# Altium PCB Customized Battery Management System - Load Sharing System.PcbDoc
Units mm, origin at the board's own origin, x right, y up, seen from the top; angles counter-clockwise.
Board outline 40 x 30 mm, 2 copper layers (Top Layer, Bottom Layer); 32 components, 21 nets, 111 pads, 0 vias.
Unrouted connection lines stored in the file: 76.
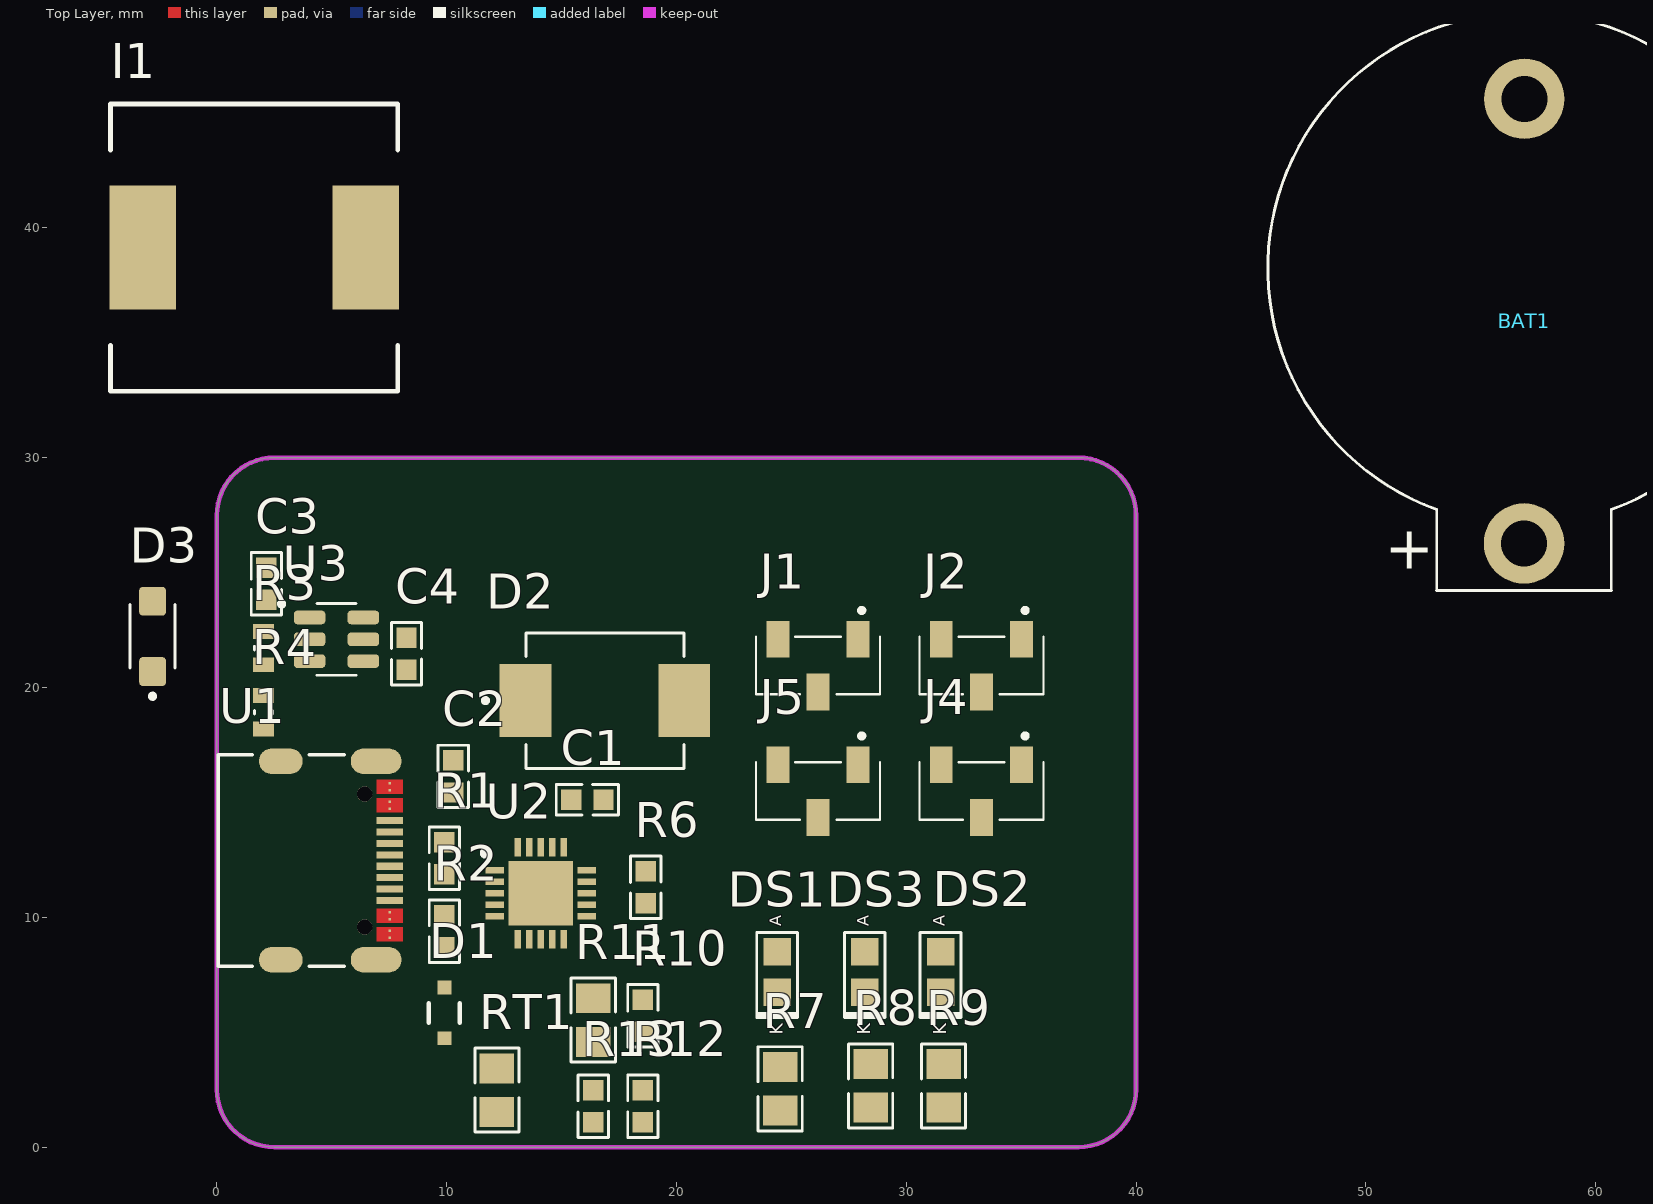
[diagram p0: Top Layer view]
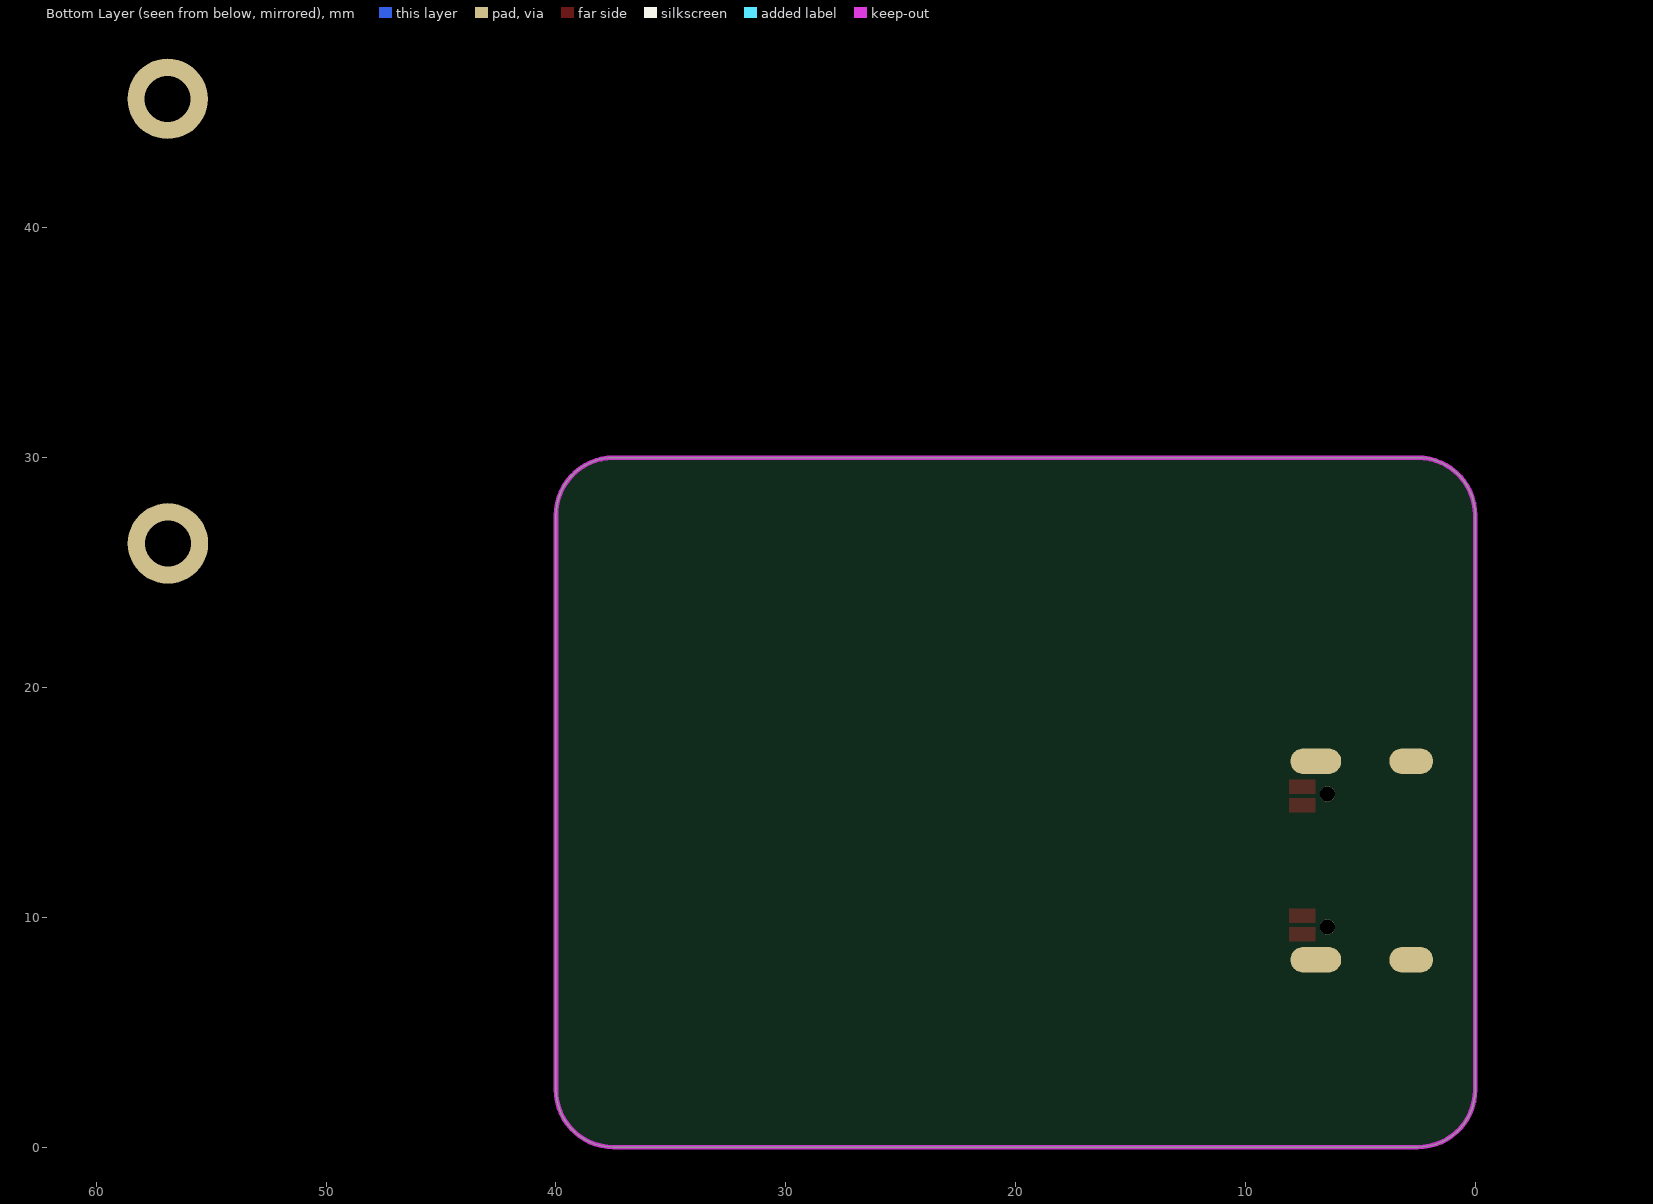
[diagram p1: Bottom Layer view, seen from below]

## Layer stack, top to bottom
Top Solder: solder mask 0.0102, Solder Resist, Dk 3.5
Top Layer: signal copper 0.0356
Dielectric 1: dielectric 0.32, FR-4, Dk 4.8
Bottom Layer: signal copper 0.0356
Bottom Solder: solder mask 0.0102, Solder Resist, Dk 3.5

## Board outline
0,2.5 0,27.5 cw(c2.5,27.5) 2.5,30 37.5,30 cw(c37.5,27.5) 40,27.5 40,2.5 cw(c37.5,2.5) 37.5,0 2.5,0 cw(c2.5,2.5)

## Design rules (kind name [scope] priority, off if disabled: settings)
Clearance [All] p1: gap=0.254 ignorepadtopadclearanceinfootprint=FALSE
PolygonConnect [All] p1: connectstyle=Relief reliefconductorwidth=0.254 reliefentries=4 polygonreliefangle="90 Angle" airgapwidth=0.254
RoutingVias [All] p1: holewidth=0.711 width=1.27 viastyle="Through Hole" minholewidth=0.711 minwidth=1.27 maxholewidth=0.711 maxwidth=1.27
SolderMaskExpansion [All] p1: expansion=0.102 istentingtop=FALSE
SupplyNets "Schematic Supply Nets_6" [InNet('VBus +5V')] p1: voltage=0.000
SupplyNets "Schematic Supply Nets_5" [InNet('+12V_Boost')] p2: voltage=0.000
SupplyNets "Schematic Supply Nets_3" [InNet('GND')] p3: voltage=0.000
SupplyNets "Schematic Supply Nets_2" [InNet('5V_USB_BUS')] p4: voltage=0.000
SupplyNets "Schematic Supply Nets_1" [InNet('5V_Vbus_BMS')] p5: voltage=0.000
SupplyNets "Schematic Supply Nets" [InNet('+5V_Battery_Supply')] p6: voltage=0.000
Width [All] p1: maxlimit=0.254 minlimit=0.254 preferedwidth=0.254
30 further rules are at their usual default settings.

## Classes and differential pairs
component class "USB-C - UART Serial Bridge": D1 R1 R2 U1
component class "Boost-Converter for OLED Interfce": C3 C4 D3 I1 R3 R4 R14 R15 U3
component class "BMS-Load Sharing Section": BAT1 C1 C2 D2 DS1 DS2 DS3 J1 J2 J4 J5 R6 R7 R8 R9 R10 R11 R12 R13 RT1 U2

## Components (designator, comment, footprint, x,y, rotation, side; value= is the part's Value field where it differs from the comment)
BAT1 "COM-2292" BAT_761_TH 56.896,37.465 r0 top
C1 "10uF" RES_0603 16.129,15.113 r180 top
C2 "4.7uF" RES_0603 10.287,16.129 r270 top
C3 "22uF" RES_0603 2.159,24.511 r270 top
C4 "22uF" RES_0603 8.255,21.463 r90 top
D1 "PESD3V3L1BA," Nexperia_SOD323_0 9.906,5.842 r90 top
D2 "=value" "SMC (DO-214AB)" 16.891,19.431 r0 top
D3 "SS24FL" "Diode SS24FL" -2.794,22.225 r90 top
DS1 "RED" LED_0805 24.384,7.62 r90 top
DS2 "GREEN LED" LED_0805 31.496,7.62 r90 top
DS3 "BLUE LED" LED_0805 28.194,7.62 r90 top
I1 "SSR1260-330M" IND_33uH_60m_Ohm_3A 1.651,39.116 r180 top
J1 "CJS-1200TA2" CJS1200TA2 26.162,20.955 r180 top
J2 "CJS-1200TA2" CJS1200TA2 33.274,20.955 r180 top
J4 "CJS-1200TA2" CJS1200TA2 33.274,15.494 r180 top
J5 "CJS-1200TA2" CJS1200TA2 26.162,15.494 r180 top
R1 "5.1K Ω" RES_0603 9.906,12.573 r90 top
R2 "5.1K Ω" RES_0603 9.906,9.398 r90 top
R3 "ERJU03J106V" "RES 0603 Panasonic" 2.032,21.717 r90 top
R4 "ERJU03J106V" "RES 0603 Panasonic" 2.032,18.923 r90 top
R6 "10K" RES_0603 18.669,11.303 r270 top
R7 "470R" RES_0805 24.511,2.54 r270 top
R8 "470R" RES_0805 28.448,2.667 r270 top
R9 "470R" RES_0805 31.623,2.667 r270 top
R10 "330K" RES_0603 18.542,5.715 r270 top
R11 "18K" RES_0805 16.383,5.527 r270 top
R12 "110K" RES_0603 18.542,1.778 r90 top
R13 "10K" RES_0603 16.383,1.778 r90 top
RT1 "10K" RES_0805 12.192,2.479 r270 top
U1 "C393939" "USB-C 16Pin" 3.856,12.473 r270 top
U2 "MCP73871" QFN50P400X400X100-21N-D 14.097,11.049 r0 top
U3 "MT3608" SOT95P280X145-6N 5.207,22.098 r0 top

## Footprints (in the part's own frame and the unit in brackets; to place one, negate y for a bottom-side part, rotate by r counter-clockwise, add the part's x,y. Pads: shape width x height; smd on the part's side, far side on the other; paste and mask are expansions set on the pad)
BAT_761_TH [mm] "Battery holder"
  round 3.5 hole 2: 1(-0.013,-11.195) 2(0,8.15)
  silkscreen extent -11.16,-13.24 11.13,11.91
CJS1200TA2 [mm]
  rect 1x1.6 smd: 1(-1.75,-1.15) 2(0,1.15) 3(1.75,-1.15)
  silkscreen extent -2.7,-2.5 2.7,1.25
"Diode SS24FL" [mm]
  rrect25% 1.25x1.16 smd: A(1.53,0) C(-1.53,0)
  silkscreen extent -2.7,-0.97 1.38,0.97, body extent -1.8,-0.86 1.8,0.86, height 1.08
IND_33uH_60m_Ohm_3A [mm]
  rect 2.9x5.4 smd paste+0 mask+0: 1(-4.825,-0.025) 2(4.875,-0.025)
  silkscreen extent -6.22,-6.28 6.28,6.22
LED_0805 [mm] "LED"
  rect 1.2x1.2 smd mask+0.076: A(0.889,0) K(-0.889,0)
  silkscreen extent -1.99,-0.89 1.73,0.89, body extent -1.01,-0.62 1.01,0.63, height 1.1
Nexperia_SOD323_0 [mm]
  rect 0.6x0.6 smd paste-1000 mask+0: 1(-1.1,0) 2(1.1,0)
  silkscreen extent -0.43,-0.67 0.43,0.67, body extent -1.53,-0.82 1.53,0.82, height 0.25
QFN50P400X400X100-21N-D [mm]
  rect 0.8x0.3 smd: 1(-2,1) 2(-2,0.5) 3(-2,0) 4(-2,-0.5) 5(-2,-1) 11(2,-1) 12(2,-0.5) 13(2,0) 14(2,0.5) 15(2,1)
  rect 0.3x0.8 smd: 6(-1,-2) 7(-0.5,-2) 8(0,-2) 9(0.5,-2) 10(1,-2) 16(1,2) 17(0.5,2) 18(0,2) 19(-0.5,2) 20(-1,2)
  rect 2.8x2.8 smd: 21(0,0)
  silkscreen extent -2.52,1.63 -2.27,1.87
"RES 0603 Panasonic" [mm]
  rect 0.65x0.9 smd: 1(-0.725,0) 2(0.725,0)
  silkscreen extent -0.08,-0.4 0.08,0.4, body extent -0.8,-0.4 0.8,0.4, height 0.45
RES_0603 [mil] "CASE: 0603"
  rect 35x35 smd mask+3: 1(-27.5,0) 2(27.5,0)
  silkscreen extent -53,-26 54,26, body extent -31,-16 31,16, height 18
RES_0805 [mm] "Resister"
  rect 1.3x1.5 smd mask+0.076: 1(0.95,0) 2(-0.95,0)
  silkscreen extent -1.83,-0.97 1.83,0.97, body extent -1,-0.63 1,0.62, height 0.5
"SMC (DO-214AB)" [mm]
  rect 2.25x3.18 smd: A(3.455,0) C(-3.455,0)
  silkscreen extent -5.3,-2.95 3.44,2.95, body extent -3.98,-2.95 3.98,2.95, height 2.65
SOT95P280X145-6N [mm]
  rrect50% 1.37x0.59 smd: 1(-1.17,0.95) 2(-1.17,0) 3(-1.17,-0.95) 4(1.17,-0.95) 5(1.17,0) 6(1.17,0.95)
  silkscreen extent -2.49,-1.57 0.85,1.64, body extent -1.45,-1.4 1.45,1.4, height 1.45
"USB-C 16Pin" [mil]
  round 26 / inner round 60 / far side round 26 hole 26 unplated paste-99999 mask+0: 29(-113.78,101.55) 30(113.78,101.55)
  rect 5x5 smd paste-2.5 mask-2.5: A1(-132.29,144.5) A4(-100.61,144.5) A9(100.6,144.5) A12(132.3,144.5) B1(120.3,144.5) B4(88.6,144.5) B9(-88.61,144.5) B12(-120.29,144.5)
  rect 12x45 smd paste+0 mask+0: A5(-49.22,144.5) A6(-9.85,144.5) A7(9.85,144.5) A8(-68.91,144.5) B5(68.91,144.5) B6(29.54,144.5) B7(-29.53,144.5) B8(49.23,144.5)
  oval 44x87 / inner round 60 / far side oval 44x87 all layers, no hole paste-99999 mask+0: S1(-170.08,121.23) S2(170.08,121.23)
  oval 44x75 / inner round 60 / far side oval 44x75 all layers, no hole paste-99999 mask+0: S3(-170.08,-42.15) S4(170.08,-42.15)
  Top Layer region: -114.29,122 -138.29,122 -138.29,167 -114.29,167
  Top Layer region: -106.61,122 -106.61,167 -82.61,167 -82.61,122
  Top Layer region: 82.6,167 106.6,167 106.6,122 82.6,122
  Top Layer region: 114.3,167 138.3,167 138.3,122 114.3,122
  silkscreen extent -181,-149 181,66

## Part data
BAT1: library part BAT_787-TH, "Basic 20mm coin cell holder. Posts can be inserted into 0.1\" perf board! Holds the common CR2032 type batteries.", Alternate Part Number-1=NA, Case/Package=TH, Manufacturer=NA, Manufacturer Part Number=NA, Supplier Part Number-1=COM-2292, Supplier-1="Rhydo Labs"
C1 C2 C3 C4: library part CAP_GENERIC_0603_1, "Ceramic Capacitor C0G, NP0 0603 (2012 Metric)", Alternate Part Number-1=NA, Case/Package=0805, Manufacturer=Yageo, Manufacturer Part Number=600F1R0BT250XT, Supplier Part Number-1=581-600F1R0BT, Supplier-1=Mouser
D1: library part DIO_TVS_PESD3V3L1BA,115
D2: library part "DIO - Diode Schottky 40 V 3A Surface Mount SMC (DO-214AB)  SS34", "Diode Schottky 40 V 3A Surface Mount SMC (DO-214AB)"
D3: library part "DIO - Schottky Diodes & Rectifiers 40V 2A", "Schottky Diodes & Rectifiers 40V, 2A SCHOTTKY"
DS1: library part LED_RED-2V-20mA-0805, "Red 631nm LED Indication - Discrete 2V 0805 (2012 Metric)", Alternate Part Number-1=NA, Case/Package=0805, Manufacturer="Vishay Lite-On", Manufacturer Part Number=LTST-C171KRKT, Supplier Part Number-1=LTST-C171KRKT, Supplier-1="SP ROAD"
DS2: library part LED_GREEN-2.2-20mA-0805, "Green 569nm LED Indication - Discrete 2.1V 0805 (2012 Metric)", Alternate Part Number-1=NA, Case/Package=0805, Manufacturer="Vishay Lite-On", Manufacturer Part Number=LTST-C171GKT, Supplier Part Number-1=LTST-C171GKT, Supplier-1="SP ROAD"
DS3: library part LED_BLUE-3V3-20mA-0805, "Blue 470nm LED Indication - Discrete 3.3V 0805 (2012 Metric)", Alternate Part Number-1=NA, Case/Package=0805, Manufacturer="Vishay Lite-On", Manufacturer Part Number=LTST-C171TBKT, Supplier Part Number-1=LTST-C171TBKT, Supplier-1="SP ROAD"
I1: library part IND_33uH_60m_Ohm_3A, "IND FIXED IND 33UH 3A 60 MOHM SMD", Manufacturer=BOURNS, Manufacturer  PN=SRR1260-330M, Supplier=LCSC, Supplier  PN=C840528
J1 J2 J4 J5: library part "Switches Slide 1 Pole, 2 Contacts, SPDT Top Setting SMD Slide Switch", "Slide Switches 1 Pole, 2 Contacts, SPDT Top Setting SMD Slide Switch"
R1 R2: library part RES_82K-0.1W-1%-0603, "82 kOhms ±1% 0.125W, 1/8W Chip Resistor 0603 (1608 Metric) Anti-Sulfur Thin Film", Alternate Part Number-1=NA, Case/Package=0603, Manufacturer="Vishay Beyschlag", Manufacturer Part Number=MCT06030C8202FP500, Supplier Part Number-1=NA, Supplier-1=SIRICOM
R3 R4: library part "RES 0603 Panasonic", "0201 anti-sulfurated resistor 0603 Anti-Sulfurated"
R6 R10 R12 R13: library part RES_10K-0.1W-1%-0603, "10 kOhms ±1% 0.1W, 1/10W Chip Resistor 0603 (1608 Metric) Automotive AEC-Q200 Thick Film", Alternate Part Number-1=0603WAJ0103T5E, Case/Package=0603, Manufacturer=Walsin, Manufacturer Part Number=WR06X1002FTL, Supplier Part Number-1=WR06X1002FTL, Supplier-1=SIRICOM
R7 R8 R9: library part RES_470R-0.125W-1%-0805, "470 Ohms ±1% 0.125W, 1/8W Chip Resistor 0805 (2012 Metric) Automotive AEC-Q200 Thick Film", Alternate Part Number-1=NA, Case/Package=0805, Manufacturer=Walsin, Manufacturer Part Number=WR08X4700FTL, Supplier Part Number-1=WR08X4700FTL, Supplier-1=SIRICOM
R11: library part RES_18K-0.125W-1%-0805, "18 kOhms ±1% 0.125W, 1/8W Chip Resistor 0805 (2012 Metric) Thick Film", Alternate Part Number-1=NA, Case/Package=0805, Manufacturer="TE Connectivity Passive Product", Manufacturer Part Number=CRG0805F18K, Supplier Part Number=NA, Supplier Part Number-1=NA, Supplier-1=SIRICOM
RT1: library part RT_10K-0805, "NTC Thermistor 10k 0805 (2012 Metric)", Alternate Part Number-1=NA, Case/Package=0805, Manufacturer="Vishay BCcomponents", Manufacturer Part Number=NCP21XV103J03RA, Supplier Part Number-1=NCP21XV103J03RA, Supplier-1=ARROW
U1: library part "USB-C 16Pin", "USB-C (USB TYPE-C) Receptacle Connector 16 Position Surface Mount, Right Angle", Manufacturer="SHOU HAN", Manufacturer PN=N/A, Supplier=LCSC, Supplier  PN=C393939
U2: library part "IC-MCP73871 Battery Management System", "Stand-Alone System Load Sharing and Li-Ion/Li-Polymer Battery Charge / Management Controller"
U3: library part "IC- Dc-Dc Boost converter", "The MT3608 is a constant frequency, 6-pin SOT23 / current mode step-up converter intended for small, / low power applications.", Manufacturer=AEROSEMI, Manufacturer  PN=MT3608, Supplier=LCSC, Supplier  PN=C84817

## Nets (pads, with @x,y where several pads share a name; then routed paths per layer and width w, separated by ;. In a path a pad name is that pad's centre, name@x,y a point inside that pad or via, vN(x,y) a via of type N, cw(c..) or ccw(c..) an arc to the next point about the centre after c; other vN are vias at no path point)
5V_USB_BUS: D1.1 J1.3 J2.3 J4.3 J5.3 U1.A4 U1.A9 U1.B4 U1.B9
5V_Vbus_BMS: C1.2 D2.C U2.18 U2.19
+5V_Battery_Supply: C2.2 C4.2 I1.1 U2.1 U2.20 U3.4 U3.5
+12V_Boost: C3.2 D3.C R3.2
CE: J2.2 R11.1 R13.2 U2.17
GND: BAT1.2 C1.1 C2.1 C3.1 C4.1 D1.2 D2.A J1.1 J2.1 J4.1 J5.1 R1.1 R2.1 R4.1 R6.1 R7.1 R8.1 R9.1 R12.1 R13.1 RT1.1 U1.A1 U1.A12 U1.B1 U1.B12 U1.S1 U1.S2 U1.S3 U1.S4 U2.6 U2.7 U2.8 U2.10 U2.11 U2.13 U2.21 U3.2
NetD3_A: D3.A I1.2 U3.1
NetDS1_K: DS1.K R7.2
NetDS2_K: DS2.K R9.2
NetDS3_K: DS3.K R8.2
NetR1_2: R1.2 U1.A5
NetR2_2: R2.2 U1.B5
NetR3_1: R3.1 R4.2 U3.3
NetR6_2: R6.2 U2.12
NetRT1_2: RT1.2 U2.5
PROG2: J4.2 U2.4
SEL: J5.2 U2.3
TE: J1.2 U2.9
VBat_Sense: BAT1.1 U2.14 U2.15 U2.16
"VBus +5V": DS1.A DS2.A DS3.A R10.2 R11.2
VPCC: R10.1 R12.2 U2.2
pads on no net: U1.29 U1.30 U1.A6 U1.A7 U1.A8 U1.B6 U1.B7 U1.B8 U3.6

## Keep-outs
Keep-Out Layer:
  the board outline again, w0.2

## Text inside footprints (layer, text, board x,y; h text height)
BAT1: Top Overlay "+" at 50.821,25.167 h1.88
DS1: Top Overlay "A" at 24.559,9.607 h0.51 r90; Top Overlay "K" at 24.634,4.895 h0.56 r90
DS2: Top Overlay "A" at 31.671,9.607 h0.51 r90; Top Overlay "K" at 31.746,4.895 h0.56 r90
DS3: Top Overlay "A" at 28.369,9.607 h0.51 r90; Top Overlay "K" at 28.444,4.895 h0.56 r90